# Altium PCB mini-rfsynth.PcbDoc
Units mil, origin at the board's own origin, x right, y up, seen from the top; angles counter-clockwise.
Board outline 1968.5 x 1574.8 mil, 2 copper layers (Top Layer, Bottom Layer), stack 65.792 mil thick; 71 components, 42 nets, 203 pads, 330 vias.
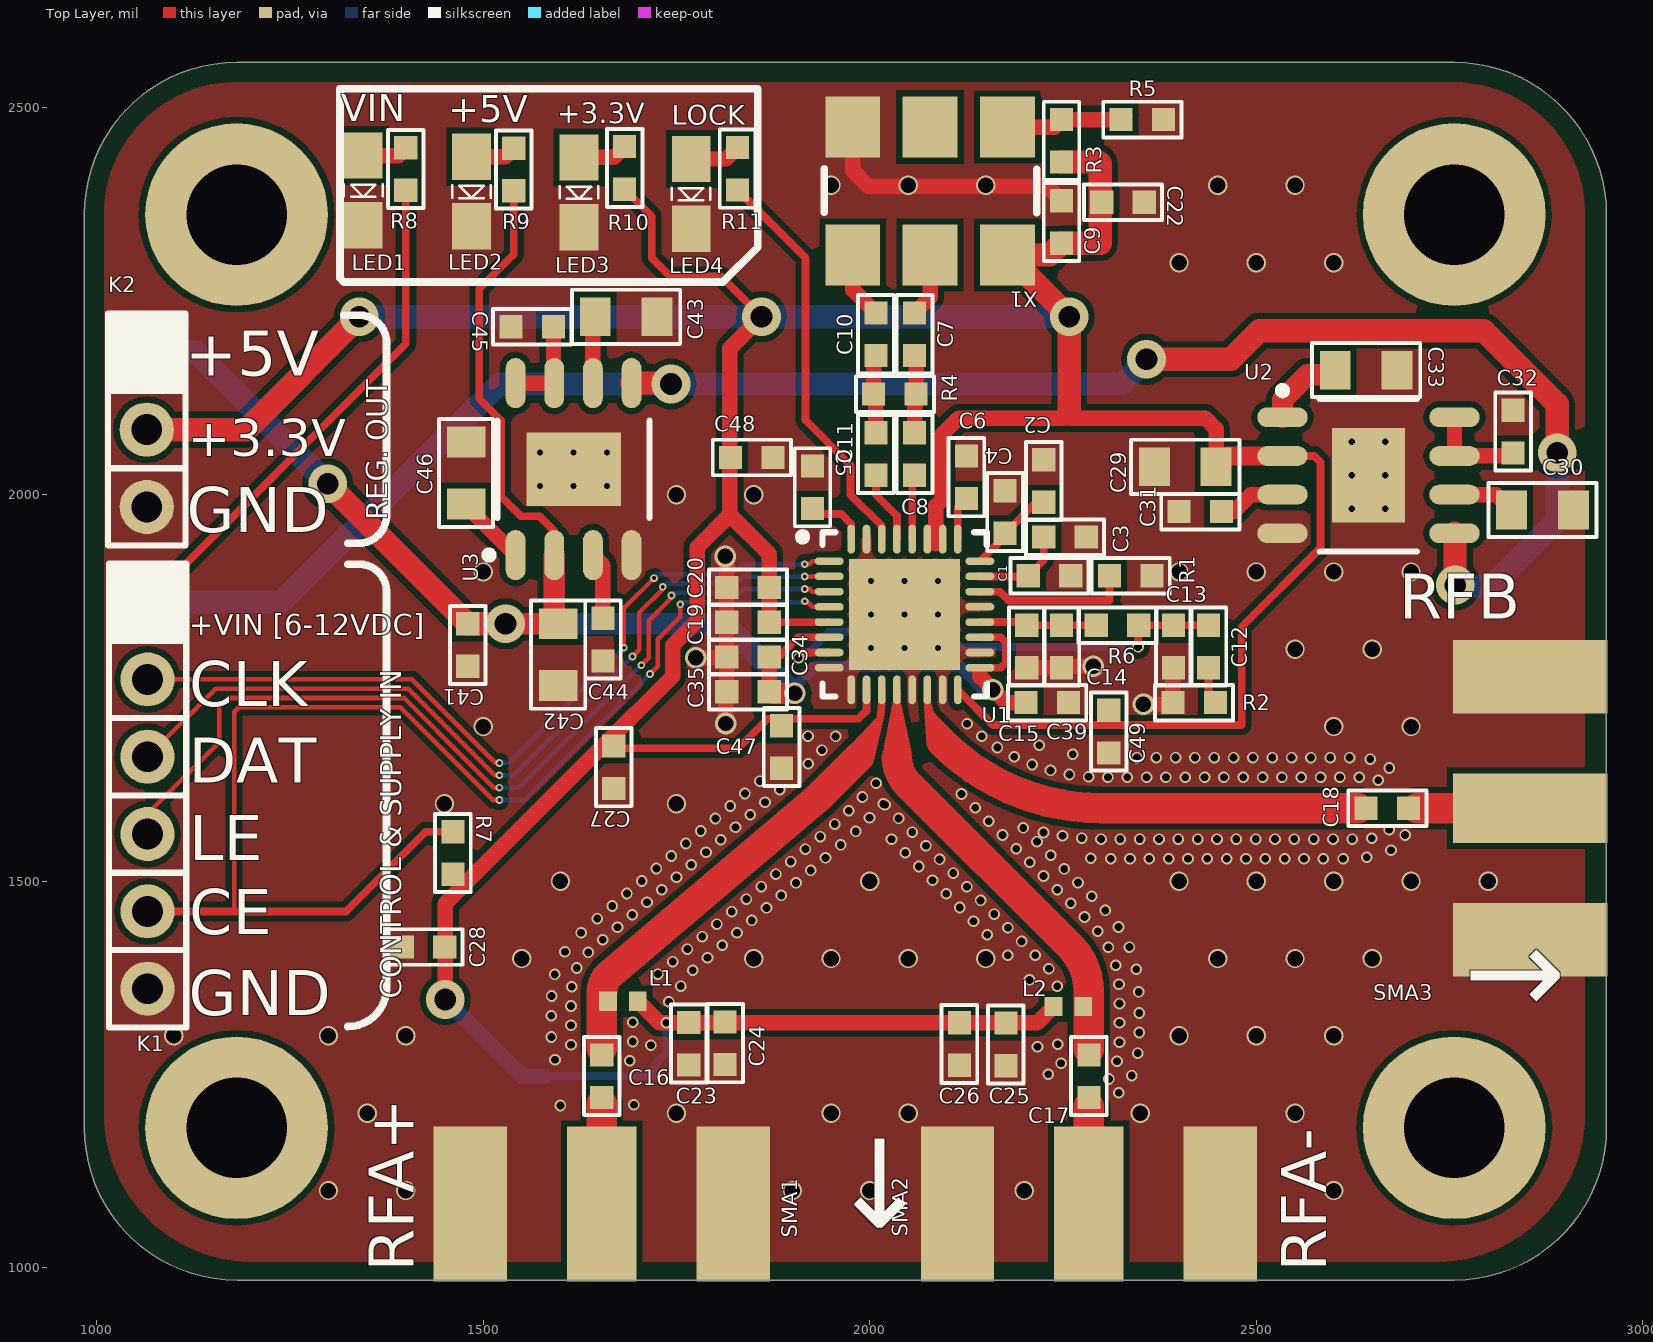
[diagram p0: Top Layer view]
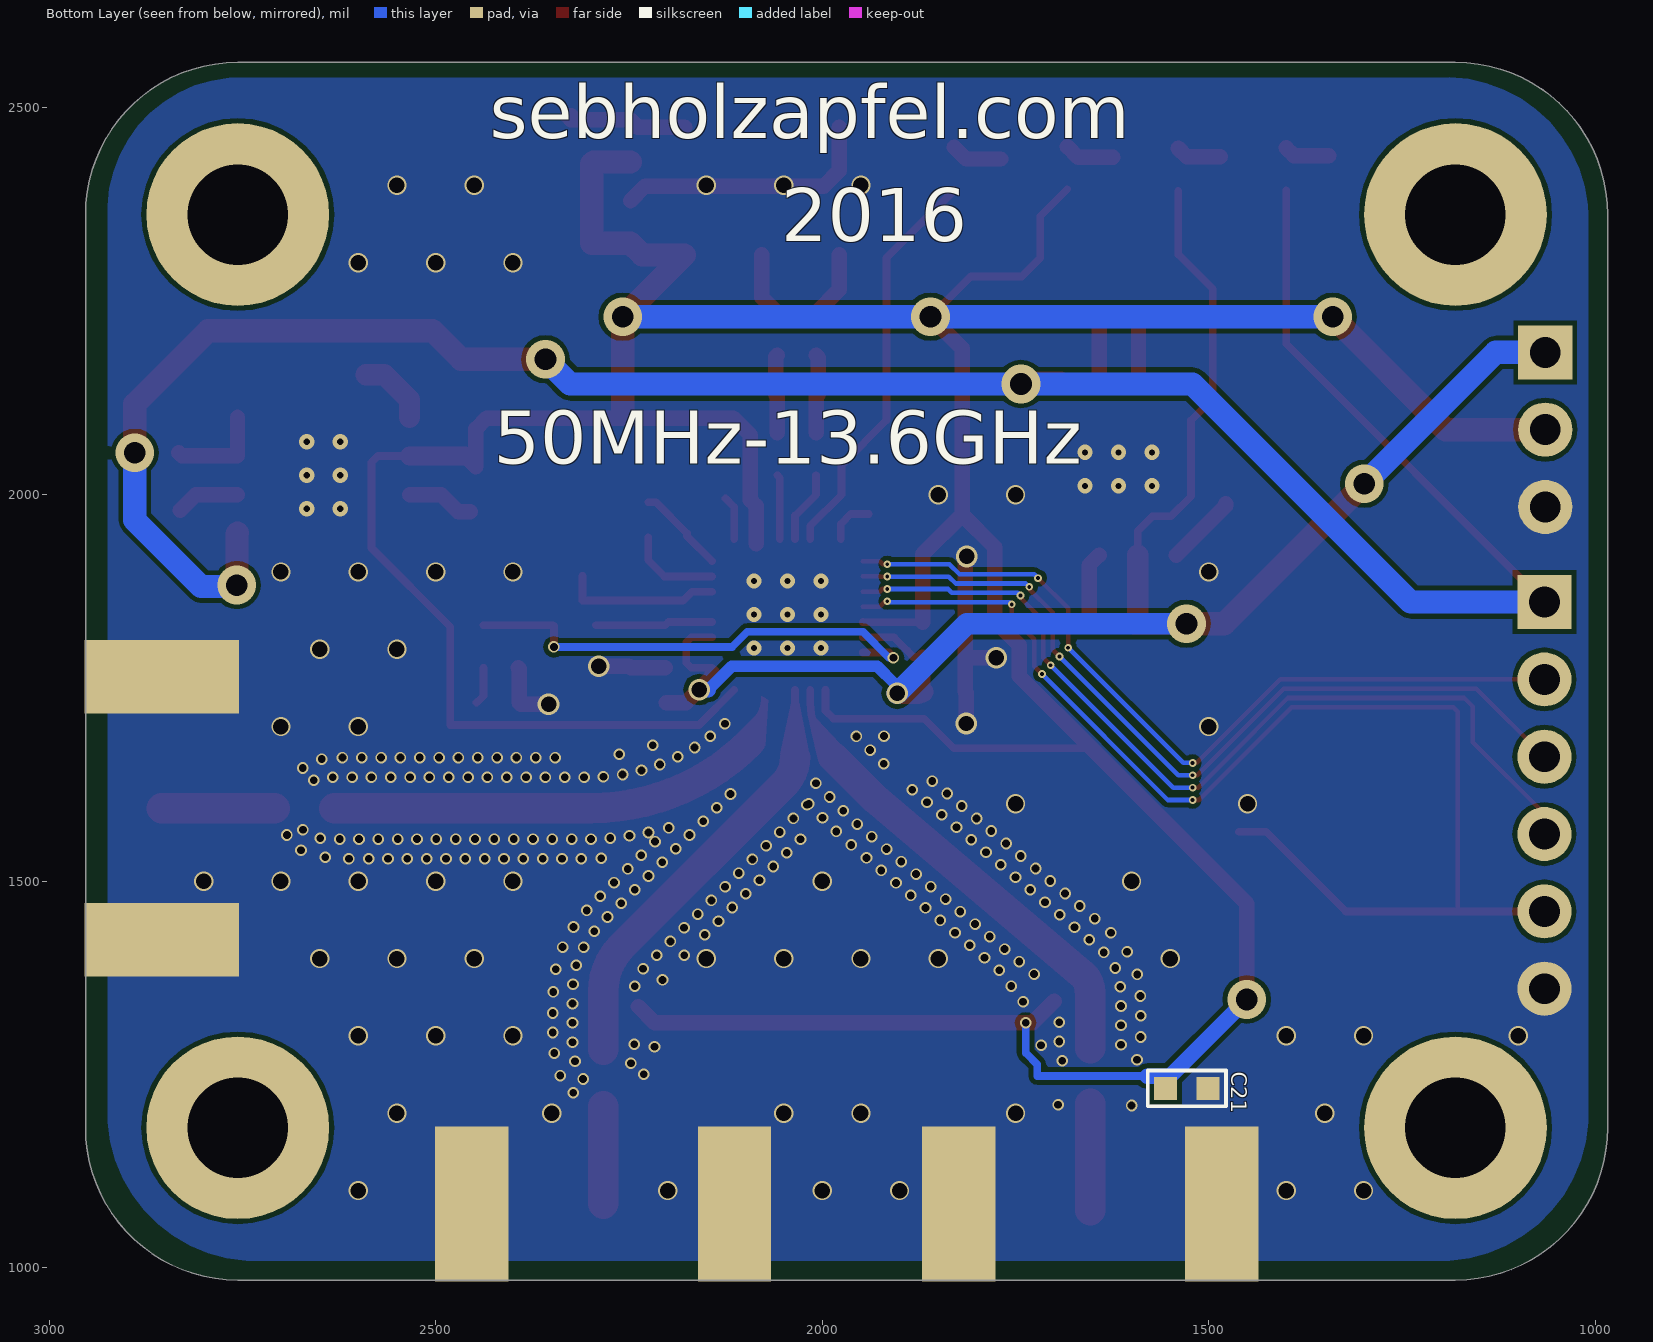
[diagram p1: Bottom Layer view, seen from below]

## Layer stack, top to bottom
Top Solder: solder mask 0.4, Solder Resist, Dk 3.5
Top Layer: signal copper 1.4
Dielectric 1: dielectric 62.9921, FR-4, Dk 4.8
Bottom Layer: signal copper 1.4
Bottom Solder: solder mask 0.4, Solder Resist, Dk 3.5

## Board outline
984.25,1181.1 984.25,2362.2 cw(c1181.1,2362.2) 1181.1,2559.05 1181.1,2559.06 2755.91,2559.06 cw(c2755.91,2362.2) 2952.76,2362.2 2952.76,1181.1 cw(c2755.91,1181.1) 2755.91,984.25 1181.1,984.25 cw(c1181.1,1181.1)

## Design rules (kind name [scope] priority, off if disabled: settings)
Clearance Clearance_1 [InNamedPolygon('TopGND')] p1: gap=7.99
Clearance [All] p2: gap=6
PlaneConnect [All] p1: planeconnectstyle=Direct reliefexpansion=20 reliefentries=4 reliefconductorwidth=10 reliefairgap=10
PolygonConnect [All] p1: connectstyle=Direct reliefconductorwidth=10 reliefentries=4 polygonreliefangle="90 Angle" airgapwidth=10
RoutingVias [All] p1: holewidth=5 width=10 viastyle="Through Hole" minholewidth=5 minwidth=10 maxholewidth=60 maxwidth=60
SolderMaskExpansion [All] p1: expansion=4
Width [All] p1: maxlimit=1000 minlimit=4 preferedwidth=10
29 further rules are at their usual default settings.

## Classes and differential pairs
net class POWER: 3V3 5V VIN
net class GND: GND

## Components (designator, comment, footprint, x,y, rotation, side; value= is the part's Value field where it differs from the comment)
C1 "10pF" 0603C-GENERIC 2205,1895 r0 top
C2 "10pF" 0603C-GENERIC 2225,1990 r90 top
C3 "100nF" 0603C-GENERIC 2225,1945 r0 top
C4 "100nF" 0603C-GENERIC 2175,1950 r90 top
C5 "100nF" 0603C-GENERIC 1926,2037 r270 top
C6 "100nF" 0603C-GENERIC 2125,2050 r270 top
C7 "1nF" 0603C-GENERIC 2058,2235 r270 top
C8 "1nF" 0603C-GENERIC 2058,2080 r270 top
C9 "100nF" 0603C-GENERIC 2248,2325 r90 top
C10 "1nF" 0603C-GENERIC 2008,2235 r270 top
C11 "1nF" 0603C-GENERIC 2008,2080 r270 top
C12 "470nF" 0603C-GENERIC 2438,1776 r90 top
C13 "22nF" 0603C-GENERIC 2393,1776 r90 top
C14 "1nF" 0603C-GENERIC 2248,1776 r90 top
C15 "10pF" 0603C-GENERIC 2203,1776 r90 top
C16 "10pF" 0603C-GENERIC 1653.54,1275.47 r270 top
C17 "10pF" 0603C-GENERIC 2283.46,1275.47 r270 top
C18 "10pF" 0603C-GENERIC 2641.85,1594.49 r0 top
C19 "10pF" 0603C-GENERIC 1870,1835 r180 top
C20 "100nF" 0603C-GENERIC 1870,1880 r180 top
C21 "10pF" 0603C-GENERIC 1556,1232 r180 bottom
C22 "100nF" 0603C-GENERIC 2300,2378 r0 top
C23 "10pF" 0603C-GENERIC 1766.02,1317.5 r270 top
C24 "100nF" 0603C-GENERIC 1813,1318 r270 top
C25 "10pF" 0603C-GENERIC 2176.02,1316.5 r270 top
C26 "100nF" 0603C-GENERIC 2116,1317 r270 top
C27 "1uF" 0603C-GENERIC 1669,1675 r270 top
C28 "1nF" 0603C-GENERIC 1450.5,1414.98 r180 top
C29 "10uF" 0805C-GENERIC 2438,2036 r180 top
C30 "10uF" 0805C-GENERIC 2900,1980 r180 top
C31 "1uF" 0603C-GENERIC 2400,1978 r0 top
C32 "1uF" 0603C-GENERIC 2832,2109 r270 top
C33 "10uF" 0805C-GENERIC 2672,2161 r180 top
C34 "10pF" 0603C-GENERIC 1870,1790 r180 top
C35 "100nF" 0603C-GENERIC 1870,1745 r180 top
C39 "100nF" 0603C-GENERIC 2202,1731 r0 top
C41 "1nF" 0603C-GENERIC 1480,1833 r270 top
C42 "10uF" 0805C-GENERIC 1597,1823 r270 top
C43 "10uF" 0805C-GENERIC 1715,2230 r180 top
C44 "1uF" 0603C-GENERIC 1655,1785 r90 top
C45 "1uF" 0603C-GENERIC 1536,2217 r0 top
C46 "10uF" 0805C-GENERIC 1478,2058 r270 top
C47 "10pF" 0603C-GENERIC 1886,1701 r270 top
C48 "100nF" 0603C-GENERIC 1820,2048 r0 top
C49 "100nF" 0603C-GENERIC 2309,1721 r270 top
K1 "HEADER-1X6" HEADER-1X6 1066,1861 r0 top
K2 "HEADER-1X3" HEADER-1X3 1065,2184 r0 top
L1 "7.5nH" 0402_INDUCTOR 1680.71,1345 r0 top
L2 "7.5nH" 0402_INDUCTOR 2257,1338 r180 top
LED1 "Green" "0805LED - GREEN" 1345,2393.5 r270 top
LED2 "Green" "0805LED - GREEN" 1485,2392 r270 top
LED3 "Green" "0805LED - GREEN" 1624,2391 r270 top
LED4 "Red" "0805LED - RED" 1769,2389 r270 top
R1 "5K1" 0603R-GENERIC 2310,1895 r0 top
R2 "220R" 0603R-220 2392,1731 r0 top
R3 "2K2" 0603R-2K2 2248,2430 r90 top
R4 "100R" 0603R-100 2060,2130 r180 top
R5 "2K2" 0603R-2K2 2380,2485 r180 top
R6 "470R" 0603R-470 2348,1831 r180 top
R7 "0603R-1K5" 0603R-1k5 1461,1564 r270 top
R8 "560R" 0603R-560 1400,2393.5 r90 top
R9 "220R" 0603R-220 1539.63,2392.87 r90 top
R10 "100R" 0603R-100 1683,2395 r90 top
R11 "100R" 0603R-100 1829,2394 r90 top
SMA1 "MOLEX_SMA_EDGE" MOLEX_SMA_EDGE 1823.54,1082.68 r90 top
SMA2 "MOLEX_SMA_EDGE" MOLEX_SMA_EDGE 2453.46,1082.68 r90 top
SMA3 "MOLEX_SMA_EDGE" MOLEX_SMA_EDGE 2854.33,1764.49 r180 top
U1 "AD5355" AD5355_LFCSP32 2045,1845 r0 top
U2 "ADM7150-3V3" ADM7150_SOIC8EP 2645,2025 r0 top
U3 "ADM7150-5V" ADM7150_SOIC8EP 1617,2033 r90 top
X1 "VG-4513CA 122.8800M VCXO" VG-4513CA-VCXO 2178,2475.35 r180 top

## Footprints (in the part's own frame and the unit in brackets; to place one, negate y for a bottom-side part, rotate by r counter-clockwise, add the part's x,y. Pads: shape width x height; smd on the part's side, far side on the other; paste and mask are expansions set on the pad)
0402_INDUCTOR [mm] "Chip Inductor, 2-Leads, Body 1.00x0.50mm, IPC Medium Density"
  rect 0.58x0.64 smd: 1(-0.49,0) 2(0.49,0)
  body extent -0.55,-0.3 0.55,0.3, height 0.6
0603C-GENERIC [mil] "CAPACITOR 0603"
  rect 30x30 smd: 1(0,0) 2(55,0)
  silkscreen extent -23,-23 78,23, body extent -4,-15 59,15, height 19
0603R-1k5 [mil] "RESISTOR 0603"
  rect 30x30 smd: 1(0,0) 2(55,0)
  silkscreen extent -23,-23 78,23, body extent -4,-15 59,15, height 20
0603R-2K2 [mil] "RESISTOR 0603"
  rect 30x30 smd: 1(0,0) 2(55,0)
  silkscreen extent -23,-23 78,23, body extent -4,-15 59,15, height 20
0603R-100 [mil] "RESISTOR 0603"
  rect 30x30 smd: 1(0,0) 2(55,0)
  silkscreen extent -23,-23 78,23, body extent -4,-15 59,15, height 20
0603R-220 [mil] "RESISTOR 0603"
  rect 30x30 smd: 1(0,0) 2(55,0)
  silkscreen extent -23,-23 78,23, body extent -4,-15 59,15, height 20
0603R-470 [mil] "RESISTOR 0603"
  rect 30x30 smd: 1(0,0) 2(55,0)
  silkscreen extent -23,-23 78,23, body extent -4,-15 59,15, height 20
0603R-560 [mil] "RESISTOR 0603"
  rect 30x30 smd: 1(0,0) 2(55,0)
  silkscreen extent -23,-23 78,23, body extent -4,-15 59,15, height 20
0603R-GENERIC [mil] "RESISTOR 0603"
  rect 30x30 smd: 1(0,0) 2(55,0)
  silkscreen extent -23,-23 78,23, body extent -4,-15 59,15, height 19
0805C-GENERIC [mil] "CAPACITOR 0805"
  rect 40x50 smd: 1(-10,0) 2(70,0)
  silkscreen extent -40,-35 100,35, body extent -11,-25 70,25, height 26
"0805LED - GREEN" [mil]
  rect 60x50 smd: A(-45,0) K(45,0)
  silkscreen extent -8,-25 9,25, body extent -45,-25 41,25, height 24
"0805LED - RED" [mil]
  rect 60x50 smd: A(-45,0) K(45,0)
  silkscreen extent -8,-25 9,25, body extent -45,-25 41,25, height 24
AD5355_LFCSP32 [mm] "QFN, 32-Leads, Body 5.00x5.00mm, Pitch 0.50mm, Thermal Pad 3.65x3.65mm, IPC Low Density"
  oval 0.95x0.25 smd: 1(-2.475,1.75) 2(-2.475,1.25) 3(-2.475,0.75) 4(-2.475,0.25) 5(-2.475,-0.25) 6(-2.475,-0.75) 7(-2.475,-1.25) 8(-2.475,-1.75) 17(2.475,-1.75) 18(2.475,-1.25) 19(2.475,-0.75) 20(2.475,-0.25) 21(2.475,0.25) 22(2.475,0.75) 23(2.475,1.25) 24(2.475,1.75)
  oval 0.25x0.95 smd: 9(-1.75,-2.475) 10(-1.25,-2.475) 11(-0.75,-2.475) 12(-0.25,-2.475) 13(0.25,-2.475) 14(0.75,-2.475) 15(1.25,-2.475) 16(1.75,-2.475) 25(1.75,2.475) 26(1.25,2.475) 27(0.75,2.475) 28(0.25,2.475) 29(-0.25,2.475) 30(-0.75,2.475) 31(-1.25,2.475) 32(-1.75,2.475)
  rect 3.65x3.65 smd: PAD(0,0)
  silkscreen extent -3.47,-2.7 2.7,2.7, body extent -2.57,-2.57 2.57,2.57, height 0.8
ADM7150_SOIC8EP [mm] "SOIC, 8-Leads, Body 4.90x3.90mm, Pitch 1.27mm, Thermal Pad 3.10x2.41mm, IPC Low Density"
  oval 1.65x0.65 smd: 1(-2.825,1.905) 2(-2.825,0.635) 3(-2.825,-0.635) 4(-2.825,-1.905) 5(2.825,-1.905) 6(2.825,-0.635) 7(2.825,0.635) 8(2.825,1.905)
  rect 2.41x3.1 smd: 4(0,0)
  silkscreen extent -2.95,-2.5 1.6,2.9, body extent -3,-2.5 3,2.5, height 1.75
HEADER-1X3 [mil]
  rect 70x70 hole 40: 1(0,0)
  round 70 hole 40: 2(0,-100) 3(0,-200)
  silkscreen extent -50,-250 50,50, body extent -50,-250 50,50, height 470
HEADER-1X6 [mil]
  rect 70x70 hole 40: 1(0,0)
  round 70 hole 40: 2(0,-100) 3(0,-200) 4(0,-300) 5(0,-400) 6(0,-500)
  silkscreen extent -50,-550 50,50, body extent -50,-550 50,50, height 470
MOLEX_SMA_EDGE [mil]
  rect 200x90 smd: 1(0,170)
  rect 200x95 all layers, no hole: 2(0,340) 2(0,0)
  body extent -482,-17 80,358, height 170
VG-4513CA-VCXO [mm]
  rect 1.8x2 smd: 1(0,0) 2(2.54,0) 3(5.08,0) 4(5.08,4.2) 5(2.54,4.2) 6(0,4.2)
  silkscreen extent -0.97,1.37 6.02,2.82, body extent -0.95,-0.47 6.03,4.76, height 1.6

## Part data
C1 C2 C15 C16 C17 C18 C19 C21 C23 C25 C34 C47: library part 0603C-10PF-50V-C0G-MUR, "CAPACITOR 0603 CERAMIC"
C3 C4 C5 C6 C9 C20 C22 C24 C26 C35 C39 C48 C49: library part 0603C-100NF-50V-X7R-TDK, "CAPACITOR 0603 CERAMIC"
C7 C8 C10 C11 C14 C28 C41: library part 0603C-1NF-50V-X7R, "CAPACITOR 0603 CERAMIC"
C12: library part 0603C-470NF-25V-X7R-MUR, "CAPACITOR 0603 CERAMIC"
C13: library part 0603C-22NF-50V-X7R-TDK, "CAPACITOR 0603 CERAMIC"
C27 C31 C32 C44 C45: library part 0603C-1UF-16V-X7R-TAY, "CAPACITOR 0603 CERAMIC"
C29 C30 C33 C42 C43 C46: library part 0805C-10UF-16V-X5R-TDK, "CAPACITOR 0805 CERAMIC"
L1 L2: library part 7.5nH-LQW15AN7N5H00D
LED1 LED2 LED3: library part "0805 SMD LED - GREEN"
LED4: library part "0805 SMD LED - RED"
R1: library part 0603R-5K1, "GENERIC RESISTOR 0603"
R2 R9: library part 0603R-220, "GENERIC RESISTOR 0603"
R3 R5: library part 0603R-2K2, "GENERIC RESISTOR 0603"
R4 R10 R11: library part 0603R-100, "GENERIC RESISTOR 0603"
R6: library part 0603R-470, "GENERIC RESISTOR 0603"
R7: "GENERIC RESISTOR 0603"
R8: library part 0603R-560, "GENERIC RESISTOR 0603"

## Free pads (board coordinates)
  round 236.22 hole 129.92: MNT(1181.1,1181.1) MNT(1181.1,2362.2) MNT(2755.91,1181.1) MNT(2755.91,2362.2)

## Via types
v1: diameter 15, hole 10, Top Layer to Bottom Layer, tented both sides, 221 vias
v2: diameter 25, hole 20, Top Layer to Bottom Layer, tented both sides, 55 vias
v3: diameter 19.68, hole 7.87, Top Layer to Bottom Layer, tented both sides, 21 vias
v4: diameter 10, hole 5, Top Layer to Bottom Layer, tented both sides, 16 vias
v5: diameter 50, hole 28, Top Layer to Bottom Layer, tented both sides, 10 vias
v6: diameter 28, hole 20, Top Layer to Bottom Layer, tented both sides, 7 vias

## Nets (pads, with @x,y where several pads share a name; then routed paths per layer and width w, separated by ;. In a path a pad name is that pad's centre, name@x,y a point inside that pad or via, vN(x,y) a via of type N, cw(c..) or ccw(c..) an arc to the next point about the centre after c; other vN are vias at no path point)
3V3: C9.1 C19.1 C20.1 C21.1 C22.1 C23.1 C24.1 C25.1 C26.1 C27.1 C28.1 C29.1 C47.1 C48.1 C49.1 K2.2 L1.2 L2.2 R3.1 R7.2 R10.1 U1.5 U1.10 U1.16 U1.26 U1.27 U2.2 X1.6 | length 6139.8
  Top Layer w10: 1652,1672 1830,1672 1868,1710 1985.34,1710 1995.79,1720.45 U1.10 ; R10.1 1718,2360 1718,2306 1742,2282 1808,2282 v5(1860,2230) ; v1(1737,1317) v1@1741,1317 ; C19.1 1947.4,1835 U1.5 ; U1.16 2159.46,1702 2481,1702 2481,1829 2583,1931 2583,2041.66 2574.66,2050 U2.2
  Top Layer w20: v5(1451,1347) 1451,1471 1652,1672 1745,1765 1745,1805 1777,1837 1777,1932 1819,1974 ; L1.2 1728,1317 v1(1737,1317) ; v1@1741,1317 1813,1317 C26.1 2216.71,1317 L2.2 ; v5(1860,2230) 1819,2189 1819,1974 ; C19.1 C20.1 1870,1923 1819,1974 ; 2085.5,1936.35 2085.5,1985.5 2092.9,1992.9 2092.9,2076.9 2115,2099 2250,2099 ; 2258,2099 2434,2099 2448,2085 C29.1 C29.1@2462,2050
  Top Layer w25: C29.1@2462,2050 U2.2
  Top Layer w30: K2.2 1194,2084 v5(1340,2230) ; R3.1 2296,2430 2298,2428 2298,2325 C9.1 2233,2310 X1.6 v5(2258,2230) 2258,2107
  Bottom Layer w10: 1580,1248 1722,1248 1722,1263 1737,1278 v1(1737,1317)
  Bottom Layer w20: v5(1451,1347) 1550,1248 1580,1248
  Bottom Layer w30: v5(1340,2230) v5(1860,2230) v5(2258,2230)
5V: C34.1 C35.1 C39.1 C41.1 C42.1 K2.1 R9.1 U1.6 U1.17 U1.19 U3.2 | length 2359.3
  Top Layer w10: R9.1 1539.63,2310.63 1495,2266 1495,2124 1523,2096 1523,1998 1549,1972 1572.93,1972 1592,1952.93 U3.2 ; C34.1 1882.17,1790 1889.5,1797.33 1889.5,1797.66 1907.31,1815.47 U1.6 ; U1.17 2169.39,1776.1 2176,1782.72 2176,1809 2169.53,1815.47 U1.19
  Top Layer w20: C42.1@1592,1838 C42.1 ; C35.1 C34.1 ; 2142.44,1769.44 2142.44,1764.56 v6(2159.22,1747.78) 2176,1731 C39.1
  Top Layer w27.56: v5(1529,1833) C42.1 ; C42.1@1592,1838 U3.2 ; C35.1 1871.77,1746.77 1875.55,1743 v6(1903,1743)
  Top Layer w30: v5(1299,2014) C41.1 v5(1529,1833)
  Bottom Layer w15: v6@1906,1740 1906,1755 1929,1778 2117,1778 v6@2147.22,1747.78
  Bottom Layer w20: v6@2147.22,1747.78 v6(2159.22,1747.78)
  Bottom Layer w27.56: v5(1529,1833) 1813,1833 v6(1903,1743)
  Bottom Layer w30: K2.1 1129,2184 v5(1299,2014)
GND: C1.2 C2.2 C3.2 C4.2 C5.1 C6.1 C9.2 C13.1 C14.1 C15.1 C19.2 C20.2 C21.2 C22.2 C23.2 C24.2 C25.2 C26.2 C27.2 C28.2 C29.2 C30.1 C31.1 C32.1 C33.1 C34.2 C35.2 C39.2 C41.2 C42.2 C43.1 C44.1 C45.1 C46.1 C47.2 C48.2 C49.2 K1.6 K2.3 LED1.K LED2.K LED3.K LED4.K R1.2 R2.1 R5.1 SMA1.2 SMA2.2 SMA3.2 U1.8 U1.9 U1.13 U1.15 U1.18 U1.21 U1.31 U1.PAD U2.4 U3.4 X1.3 | length 771.2
  Top Layer w10: C35.2@1814,1744 C35.2
  Top Layer w20: v6(1775,1789) 1814,1789 C34.2 ; v6(1813,1920) 1815,1918 C20.2 C19.2 C34.2 ; v6(1814,1704) C35.2@1814,1744 ; C35.2 C34.2 ; X1.3 1978,2419 1998,2399 2229,2399 C9.2 ; C15.1 C14.1 2250,1778 v6(2289,1778) ; v6(2354,1729) 2390,1729 R2.1 2392,1775 C13.1
  other v1: 1600,1210 1695,1211 2321.89,1226.29 2309.34,1244.29 2338.75,1248.68 2230.9,1250.33 2247.43,1264.64 2319.7,1267.04 1689.74,1267.98 1593,1269 2346.74,1277.73 2217,1286 1716.96,1287.79 1613.59,1288.67 2243.12,1289.26 2323.02,1291.82 1693.5,1292.7 1588.37,1298.59 2348.51,1304.32 1613.59,1313.67 2323.02,1316.82 1693.5,1317.7 1588.1,1326.17 2348.51,1329.64 1613.59,1338.67 2323.02,1341.82 1740.29,1344.04 1588.54,1351.61 2347.99,1356.86 1614.46,1363.66 1755.71,1364.38 2242.61,1364.26 2322.38,1366.81 2206.59,1372.38 1592.7,1379.51 1726.04,1379.92 1771.12,1384.72 2344.57,1386.09 2231.72,1386.76 1621.02,1387.78 2318.02,1391.42 1745.11,1396.08 1790.2,1400.88 2178.34,1404.11 2214.05,1404.45 1635.79,1407.95 1605.82,1408.74 1764.18,1412.25 2308.7,1414.62 2335.78,1414.85 1809.27,1417.04 2196.37,1422.12 1654.75,1424.25 1783.26,1428.41 2151.83,1430.62 1626.68,1433.3 1828.34,1433.2 2294.81,1435.41 1673.82,1440.41 2178.7,1439.8 2321.68,1440.77 1802.33,1444.57 2134.16,1448.29 1847.42,1449.37 1647.74,1451.72 2277.79,1453.72 1692.89,1456.57 2161.02,1457.48 1821.4,1460.73 2304.64,1462.25 1866.49,1465.53 2116.48,1465.97 1666.88,1467.94 2260.11,1471.39 1711.97,1472.74 2143.34,1475.16 1840.48,1476.89 2286.97,1480.58 1885.56,1481.69 1685.95,1484.1 2098.8,1483.65 1731.04,1488.9 2242.43,1489.07 1859.55,1493.06 2125.66,1492.84 1904.64,1497.85 2269.29,1498.26 1705.02,1500.26 2081.12,1501.33 1750.11,1505.06 2224.75,1506.75 1878.62,1509.22 2107.99,1510.51 1923.71,1514.01 1724.1,1516.43 2251.61,1515.93 2063.45,1519.01 1769.19,1521.22 2207.07,1524.43 1897.69,1525.38 2090.31,1528.19 2311.6,1529.04 2336.6,1529.05 2361.59,1529.05 2386.59,1529.05 2411.59,1529.05 2436.59,1529.05 2461.59,1529.05 2486.59,1529.05 2511.59,1529.05 2536.59,1529.05 2561.59,1529.05 2586.59,1529.05 2612.13,1529.06 1942.78,1530.18 2285.95,1529.71 2642.66,1530.85 1743.17,1532.59 2233.94,1533.61 1788.26,1537.38 2045.77,1536.68 2674.17,1540.14 1916.77,1541.54 2189.4,1542.1 2072.63,1545.87 1962.51,1546.94 1762.24,1548.75 2216.26,1551.29 1807.33,1553.55 2028.09,1554.36 2299.09,1554.53 2324.09,1554.54 2349.09,1554.54 2374.09,1554.54 2399.09,1554.54 2424.09,1554.54 2449.09,1554.54 2474.09,1554.54 2499.09,1554.54 2524.09,1554.54 2549.09,1554.54 2574.09,1554.54 2599.09,1554.54 2624.09,1554.54 2274.13,1555.84 2649.07,1555.58 1935.84,1557.7 2249.3,1558.73 2171.72,1559.78 2692.35,1559.73 2224.67,1563.05 1981.77,1564.45 2054.95,1563.55 1781.32,1564.91 2671.59,1566.45 2198.58,1568.97 1826.41,1569.71 1954.91,1573.87 2154.04,1577.46 1800.39,1581.07 2037.28,1581.22 1999.68,1582.13 1845.48,1585.87 1972.82,1591.32 2136.36,1595.14 1819.46,1597.24 2019.72,1599.03 2017.53,1599.99 1864.55,1602.03 1990.5,1608.99 1838.54,1613.4 2118.69,1612.82 1883.63,1618.19 2008.17,1626.67 1857.61,1629.56 2657.75,1630.73 2308.02,1634.44 2333.02,1634.44 2358.02,1634.44 2383.02,1634.44 2408.02,1634.44 2433.02,1634.44 2458.02,1634.44 2483.02,1634.44 2508.02,1634.44 2533.02,1634.44 2558.02,1634.44 2583.02,1634.44 2608.02,1634.44 2633.02,1634.44 2283.03,1635.1 2258.2,1638 2233.77,1643.29 2672,1646.42 2209.96,1650.93 1920.45,1651.96 2647.28,1657.94 2345.52,1659.93 2370.52,1659.93 2395.52,1659.93 2420.52,1659.93 2445.52,1659.93 2470.52,1659.93 2495.52,1659.93 2520.52,1659.93 2545.52,1659.93 2570.52,1659.93 2595.52,1659.93 2620.52,1659.93 2187.01,1660.85 2262.61,1664.24 1938.13,1669.63 2165.13,1672.94 2219.32,1675.85 1955.81,1687.31 2144.74,1687.41 1920.12,1687.67 2125.85,1703.78
  other v2: 1300,1100 1400,1100 1900,1100 2000,1100 2200,1100 2600,1100 1350,1200 1750,1200 1950,1200 2050,1200 2350,1200 2550,1200 1100,1300 1300,1300 1400,1300 2400,1300 2500,1300 2600,1300 1550,1400 1850,1400 1950,1400 2050,1400 2150,1400 2450,1400 2550,1400 2650,1400 1600,1500 2000,1500 2400,1500 2500,1500 2600,1500 2700,1500 2800,1500 1450,1600 1750,1600 1500,1700 2600,1700 2700,1700 2550,1800 2650,1800 1500,1900 2400,1900 2500,1900 2600,1900 2700,1900 1750,2000 1850,2000 2400,2300 2500,2300 2600,2300 1950,2400 2050,2400 2150,2400 2450,2400 2550,2400
  other v3: 2001.69,1801.69 2045,1801.69 2088.31,1801.69 2001.69,1845 2045,1845 2088.31,1845 2001.69,1888.31 2045,1888.31 2088.31,1888.31 2623.35,1981.69 2666.65,1981.69 1573.69,2011.35 1617,2011.35 1660.31,2011.35 2623.35,2025 2666.65,2025 1573.69,2054.65 1617,2054.65 1660.31,2054.65 2623.35,2068.31 2666.65,2068.31
NetC1_1: C1.1 C3.1 U1.23 | length 121.2
  Top Layer w10: U1.23 2204.21,1894.21 C1.1 2225,1915 C3.1
NetC2_1: C2.1 C4.1 U1.24 | length 116.2
  Top Layer w10: U1.24 2175,1946.46 C4.1 2215,1990 C2.1
NetC5_2: C5.2 U1.32 | length 61
  Top Layer w10: C5.2@1940,1975 1963.01,1975 1976.1,1961.91 U1.32
NetC6_2: C6.2 U1.25 | length 57.2
  Top Layer w10: U1.25 2113.9,1983.9 C6.2
NetC7_1: C7.1 X1.5 | length 83.3
  Top Layer w20: C7.1 2078,2255 X1.5
NetC7_2: C7.2 C8.1 R4.1 | length 101.7
  Top Layer w20: C8.1 2058,2128 R4.1 2060,2178 C7.2
NetC8_2: C8.2 U1.28 | length 83.9
  Top Layer w10: U1.28 2054.84,2021.84 C8.2
NetC10_1: C10.1 X1.4 | length 87.4
  Top Layer w20: X1.4 1978,2265 C10.1
NetC10_2: C10.2 C11.1 R4.2 | length 102.5
  Top Layer w20: C11.1 2008,2127 R4.2 2005,2177 C10.2
NetC11_2: C11.2 U1.29 | length 93.8
  Top Layer w10: C11.2 2008,2000 2035.16,1972.84 U1.29
NetC12_1: C12.1 R2.2 | length 48.7
  Top Layer w10: C12.1 2438,1740 R2.2
NetC12_2: C12.2 C13.2 R6.1 U1.7 | length 621.4
  Top Layer w10: v1@1908,1790 1913.79,1795.79 U1.7 ; v1(2347,1803) 2347,1830 R6.1 C13.2 C12.2
  Bottom Layer w10: v1(1908,1789) 1913.84,1789 1947.37,1822.54 2096.94,1822.54 2116.48,1803 v1(2347,1803)
NetC14_2: C14.2 C15.2 R6.2 U1.20 | length 152.3
  Top Layer w10: U1.20 2198.84,1835.16 C15.2 C14.2 R6.2
NetC16_1: C16.1 L1.1 U1.11 | length 621.1
  Top Layer w10: L1.1@1653.54,1357.32 cw(c1654.89,1357.32) 1653.94,1358.27 ; 1986.18,1661.18 ccw(c1915.47,1731.89) 2015.47,1731.89 U1.11
  Top Layer w39.37: C16.1@1653.54,1284 L1.1@1653.54,1357.32 ; 1653.94,1358.27 cw(c1682.11,1358.27) 1662.19,1378.19 1930.8,1605.8 1986.18,1661.18
NetC16_2: C16.2 SMA1.1 | length 137.8
  Top Layer w39.37: SMA1.1@1653.54,1074.68 SMA1.1 C16.2@1653.54,1212.47
NetC17_1: C17.1 L2.1 U1.12 | length 563.7
  Top Layer w10: 2035.16,1660 U1.12 ; C17.1@2283.07,1276.42 ccw(c2284.42,1276.42) C17.1
  Top Layer w39.37: 2035.16,1660 ccw(c2083.82,1660) 2049.41,1625.59 2259.27,1415.73 cw(c2201.8,1358.27) 2283.07,1358.27 C17.1@2283.07,1282
NetC17_2: C17.2 SMA2.1 | length 126.3
  Top Layer w39.37: SMA2.1 C17.2@2283.46,1209
NetC18_1: C18.1 U1.14 | length 561.1
  Top Layer w39.37: 2092.78,1680.22 ccw(c2299.75,1887.2) 2299.75,1594.49 C18.1@2631,1594.49
NetC18_2: C18.2 SMA3.1 | length 146.3
  Top Layer w39.37: C18.2@2708,1594.49 SMA3.1
NetC30_2: C30.2 U2.6 | length 82.1
  Top Layer w20: U2.6 2810,2000 C30.2
NetC31_2: C31.2 U2.3 | length 87.9
  Top Layer w20: C31.2 2470.9,1978 2492.9,2000 U2.3
NetC32_2: C32.2 U2.7 U2.8 | length 127.4
  Top Layer w20: U2.8 U2.7 2828,2050 C32.2
NetC33_2: C33.2 U2.1 | length 92.3
  Top Layer w27.56: U2.1 2533.78,2122.78 2566,2155 C33.2@2590,2155
NetC43_2: C43.2 U3.6 | length 87
  Top Layer w20: U3.6 1642,2227 C43.2
NetC44_2: C44.2 U3.3 | length 87.2
  Top Layer w20: U3.3 1655,1908.78 C44.2
NetC45_2: C45.2 U3.7 U3.8 | length 123.2
  Top Layer w20: U3.8 U3.7 1591,2145.22 C45.2
NetC46_2: C46.2 U3.1 | length 92.7
  Top Layer w20: C46.2 1478,1985.78 U3.1
NetK1_2: K1.2 U1.1 | length 1064.2
  Top Layer w6: K1.2 1407.91,1761 1515.91,1653 v4(1521,1653) ; v4(1682,1802) 1682,1853 v4(1721,1892) ; v4(1916,1910) 1921.96,1910 1925.86,1913.9 U1.1
  Bottom Layer w6: v4(1521,1653) 1533,1653 v4(1682,1802) ; v4(1721,1892) 1726,1897 1822.53,1897 1835.53,1910 v4(1916,1910)
NetK1_3: K1.3 U1.2 | length 1100.8
  Top Layer w6: K1.3 1154,1749 1402.94,1749 1514.94,1637 v4(1521,1637) ; v4(1693.31,1790.69) 1702,1799.37 1702,1847.54 1732.31,1877.86 v4(1732.31,1880.69) ; v4(1916,1894) 1925.65,1894 1925.86,1894.21 U1.2
  Bottom Layer w6: v4(1521,1637) 1539.63,1637 v4(1693.31,1790.69) ; v4(1732.31,1880.69) 1736.63,1885 1827.5,1885 1836.5,1894 v4(1916,1894)
NetK1_4: K1.4 U1.3 | length 1182.5
  Top Layer w6: K1.4 1066,1587 1158.97,1679.97 1158.97,1725.97 1170,1737 1397.97,1737 1481.49,1653.49 1513.97,1621 v4(1521,1621) ; v4(1704.63,1779.37) 1714,1788.75 1714,1836.92 1743.63,1866.54 v4(1743.63,1869.37) ; v4(1916,1878) 1922.39,1878 1925.86,1874.53 U1.3
  Bottom Layer w6: v4(1521,1621) 1546.25,1621 v4(1704.63,1779.37) ; v4(1743.63,1869.37) 1747.25,1873 1832.47,1873 1837.47,1878 v4(1916,1878)
NetK1_5: K1.5 R7.1 U1.4 | length 1656.7
  Top Layer w6: 1178,1461 1178,1719 1184,1725 1393,1725 1513,1605 v4(1521,1605) ; v4(1715.94,1768.06) 1726,1778.12 1726,1812.87 1754.94,1841.81 v4(1754.94,1858.06) ; v4(1916,1862) 1918.7,1862 1925.86,1854.84 U1.4
  Top Layer w10: K1.5 1178,1461 1323,1461 1426,1564 R7.1
  Bottom Layer w6: v4(1521,1605) 1552.88,1605 v4(1715.94,1768.06) ; v4(1754.94,1858.06) 1757.88,1861 1915,1861 v4(1916,1862)
NetLED1_A: LED1.A R8.2 | length 59.1
  Top Layer w20: LED1.A 1390,2438.5 R8.2
NetLED2_A: LED2.A R9.2 | length 59.1
  Top Layer w20: LED2.A 1528.75,2437 R9.2
NetLED3_A: LED3.A R10.2 | length 64.8
  Top Layer w20: LED3.A 1669,2436 R10.2
NetLED4_A: LED4.A R11.2 | length 66.2
  Top Layer w20: LED4.A 1814,2434 R11.2
NetR1_1: R1.1 U1.22 | length 204.3
  Top Layer w10: U1.22 2168.47,1874.53 2180,1863 2310,1863 R1.1
NetR3_2: R3.2 R5.2 X1.1 | length 161
  Top Layer w20: X1.1 2238.35,2475.35 R3.2 R5.2 2324.71,2489.68 R5.2@2330,2490
NetR11_1: R11.1 U1.30 | length 528.8
  Top Layer w10: R11.1 1917,2306 1917,2096 1975,2038 1975,2000 2015.47,1959.53 U1.30
VIN: K1.1 R8.1 U2.5 U3.5 | length 3117
  Top Layer w10: K1.1 1400,2195 R8.1
  Top Layer w30: U3.5 1741.78,2144.22 v5(1743,2143) ; v5(2358,2175) 2467,2175 2504,2212 2794,2212 2889,2117 v5(2889,2054) ; U2.5 2757,1949.22 v5(2757,1883)
  Bottom Layer w30: K1.1 1239,1861 1521,2143 v5(1743,2143) 2326,2143 v5(2358,2175) ; v5(2757,1883) 2757,1881 2803,1881 2889,1967 v5(2889,2054)
pads on no net: X1.2

## Polygon pours and split planes (outlines as drawn)
GND on Bottom Layer "Bottom Layer-No Net" (solid, remove dead copper, pour order 7): 1009.33,1200.79 1009.33,2362.2 cw(c1193.64,2355.06) 1200.79,2539.37 2755.91,2539.37 cw(c2751.32,2366.79) 2923.9,2362.2 2923.9,1200.79 cw(c2732.44,1200.79) 2732.44,1009.33 1200.79,1009.33 cw(c1200.79,1200.79)
GND on Top Layer "TopGND" (solid, remove dead copper, pour order 6): 1009.97,1199.57 1009.97,2362.2 cw(c1181.1,2362.2) 1181.1,2533.33 2755.91,2533.33 cw(c2754.66,2363.45) 2924.54,2362.2 2924.54,1199.58 cw(c2733.08,1199.57) 2733.08,1008.12 1201.43,1008.12 cw(c1201.43,1199.57)

## Other copper
Top Layer:
  region net NetC16_1: 1978,1679 2008,1711 2016,1703 2005,1656 1978,1657
  region net NetC17_1: 2016,1661 2030,1731 2040,1731 2054,1665 2035.16,1661
  region net NetC18_1: 2074,1675 2070,1735 2079,1740 2079,1735 ccw(c2110.38,1735) 2088.19,1712.81 2110,1691

## Silkscreen, mask and mechanical layers (free items; w line width, h text height)
Top Overlay:
  lines w10: 1320,2232 1340,2232 cw(c1340,2197) 1375,2197 ; 1325,1312 ccw(c1325,1362) 1375,1362 1375,1875 ccw(c1340,1875) 1340,1910 1325,1910 ; 1325,1937 1339,1937 ccw(c1339,1973) 1375,1973 ; 1375,1971 1375,2200 ; 1315,2280 1320,2275 1810,2275 1855,2320 1855,2525 1315,2525 1315,2280
  text "VIN" at 1316.38,2471.37 h60
  text "+3.3V" at 1596,2471 h45.28
  text "+5V" at 1455,2470 h60
  text "LOCK" at 1744,2470 h43.31
  text "+5V" at 1115,2134.38 h100
  text "+3.3V" at 1118,2033.38 h82.68
  text "REG. OUT" at 1385,1967 h47.24 r90
  text "GND" at 1117,1932 h100
  text "RFB" at 2685,1820 h100
  text "+VIN [6-12VDC]" at 1120,1809 h47.24
  text "CLK" at 1120,1707 h100
  text "DAT" at 1119,1608 h100
  text "LE" at 1120,1508 h100
  text "CE" at 1120,1412 h100
  text "CONTROL & SUPPLY IN" at 1403,1348 h47.24 r90
  text "GND" at 1119,1307 h100
  text "→" at 2768,1291 h196.85
  text "→" at 1926,1176 h196.85 r270
  text "RFA+" at 1430,995 h100 r90
  text "RFA-" at 2610,995 h100 r90
Bottom Overlay:
  text "sebholzapfel.com" at 2430,2438 h118.11
  text "2016" at 2053,2305 h118.11
  text "50MHz-13.6GHz" at 2425,2017 h118.11
  text "WIDEBAND RF SYNTHESIZER" at 2697,1363 h200
Top Solder:
  region: 1431.06,1003.77 1441,1230 cw(c1601.75,1200.42) 1509,1335 1857.35,1672.65 cw(c2009.37,1583.4) 1965,1754 2124,1754 cw(c2111.34,1731.86) 2136.55,1728 cw(c2125.83,1720.63) 2136.55,1713.27 cw(c2131.01,1704.09) 2141.39,1706.77 cw(c2142.22,1704.75) 2143.05,1706.77 cw(c2138.3,1703.49) 2143.05,1700.22 ccw(c2172.4,1711.15) 2159.39,1682.67 2336,1677 ccw(c2360.2,2428.96) 2625.06,1724.77 ccw(c2609.43,1748.15) 2632.8,1732.52 2699.06,1798.77 cw(c2743.49,1756.37) 2742.06,1817.77 2932.06,1817.77 2932.06,1380.6 cw(c2925.28,1380.58) 2930.06,1375.77 ccw(c2927.66,1373.41) 2927.64,1376.77 2749.06,1376.77 2658.34,1467.48 ccw(c2587.66,1396.83) 2587.63,1496.77 2329.06,1496.77 2376.77,1449.06 cw(c2306.11,1378.37) 2406.06,1378.35 2406.06,1342.77 ccw(c2444.68,1342.77) 2417.37,1315.46 2480.06,1252.77 cw(c2436.66,1209.34) 2498.06,1209.31 2498.06,1005.77 2063.47,1005.77 ccw(c2063.45,1002.4) 2061.06,1004.77 ccw(c2058.66,1007.18) 2062.06,1007.18 2062.06,1179.77 cw(c2153.8,1179.77) 2088.93,1244.64 2143.06,1298.77 ccw(c2092.37,1349.46) 2164.06,1349.47 2164.06,1359.77 2001.76,1522.06 ccw(c2000.08,1520.41) 2000.06,1522.77 ccw(c2000.03,1491.44) 1977.86,1513.58 1824.06,1359.77 1824.06,1299.54 ccw(c1912.82,1299.54) 1850.06,1236.77 cw(c1797,1183.68) 1872.06,1183.66 1872.06,994.77
Mechanical 1:
  the board outline again, w10